# Allegro board modbusRTU.brd
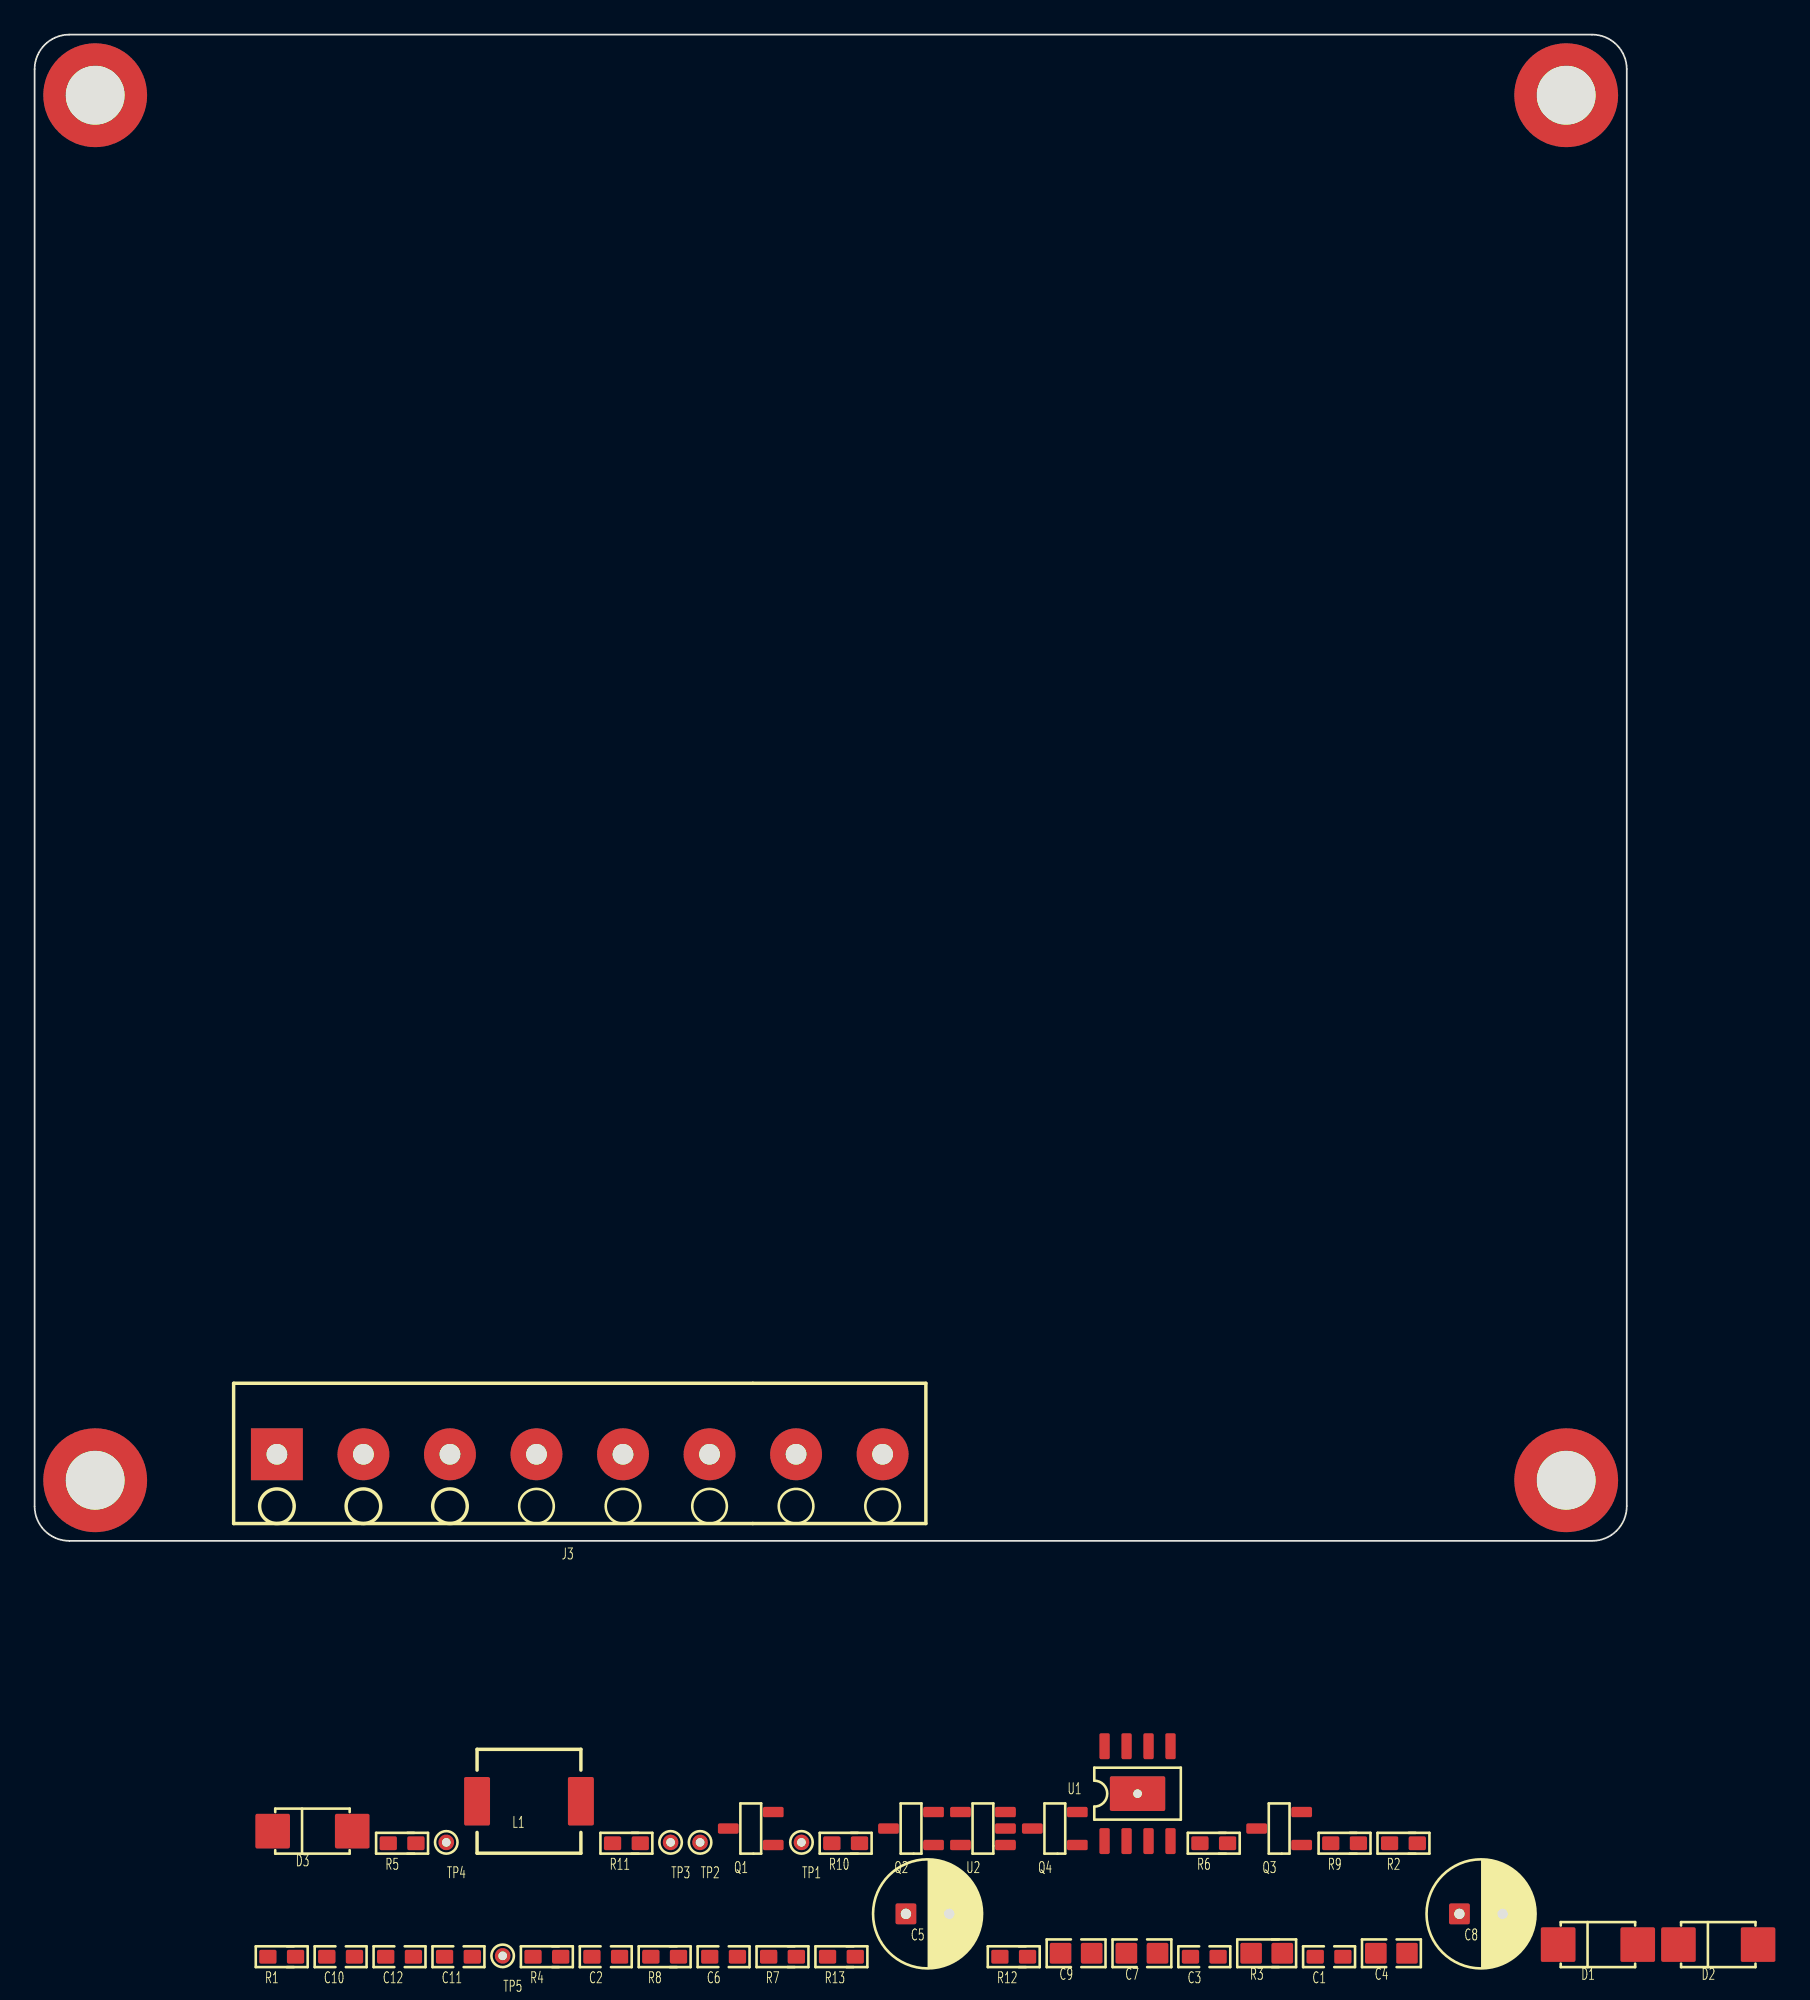
[diagram p0: board, top side]
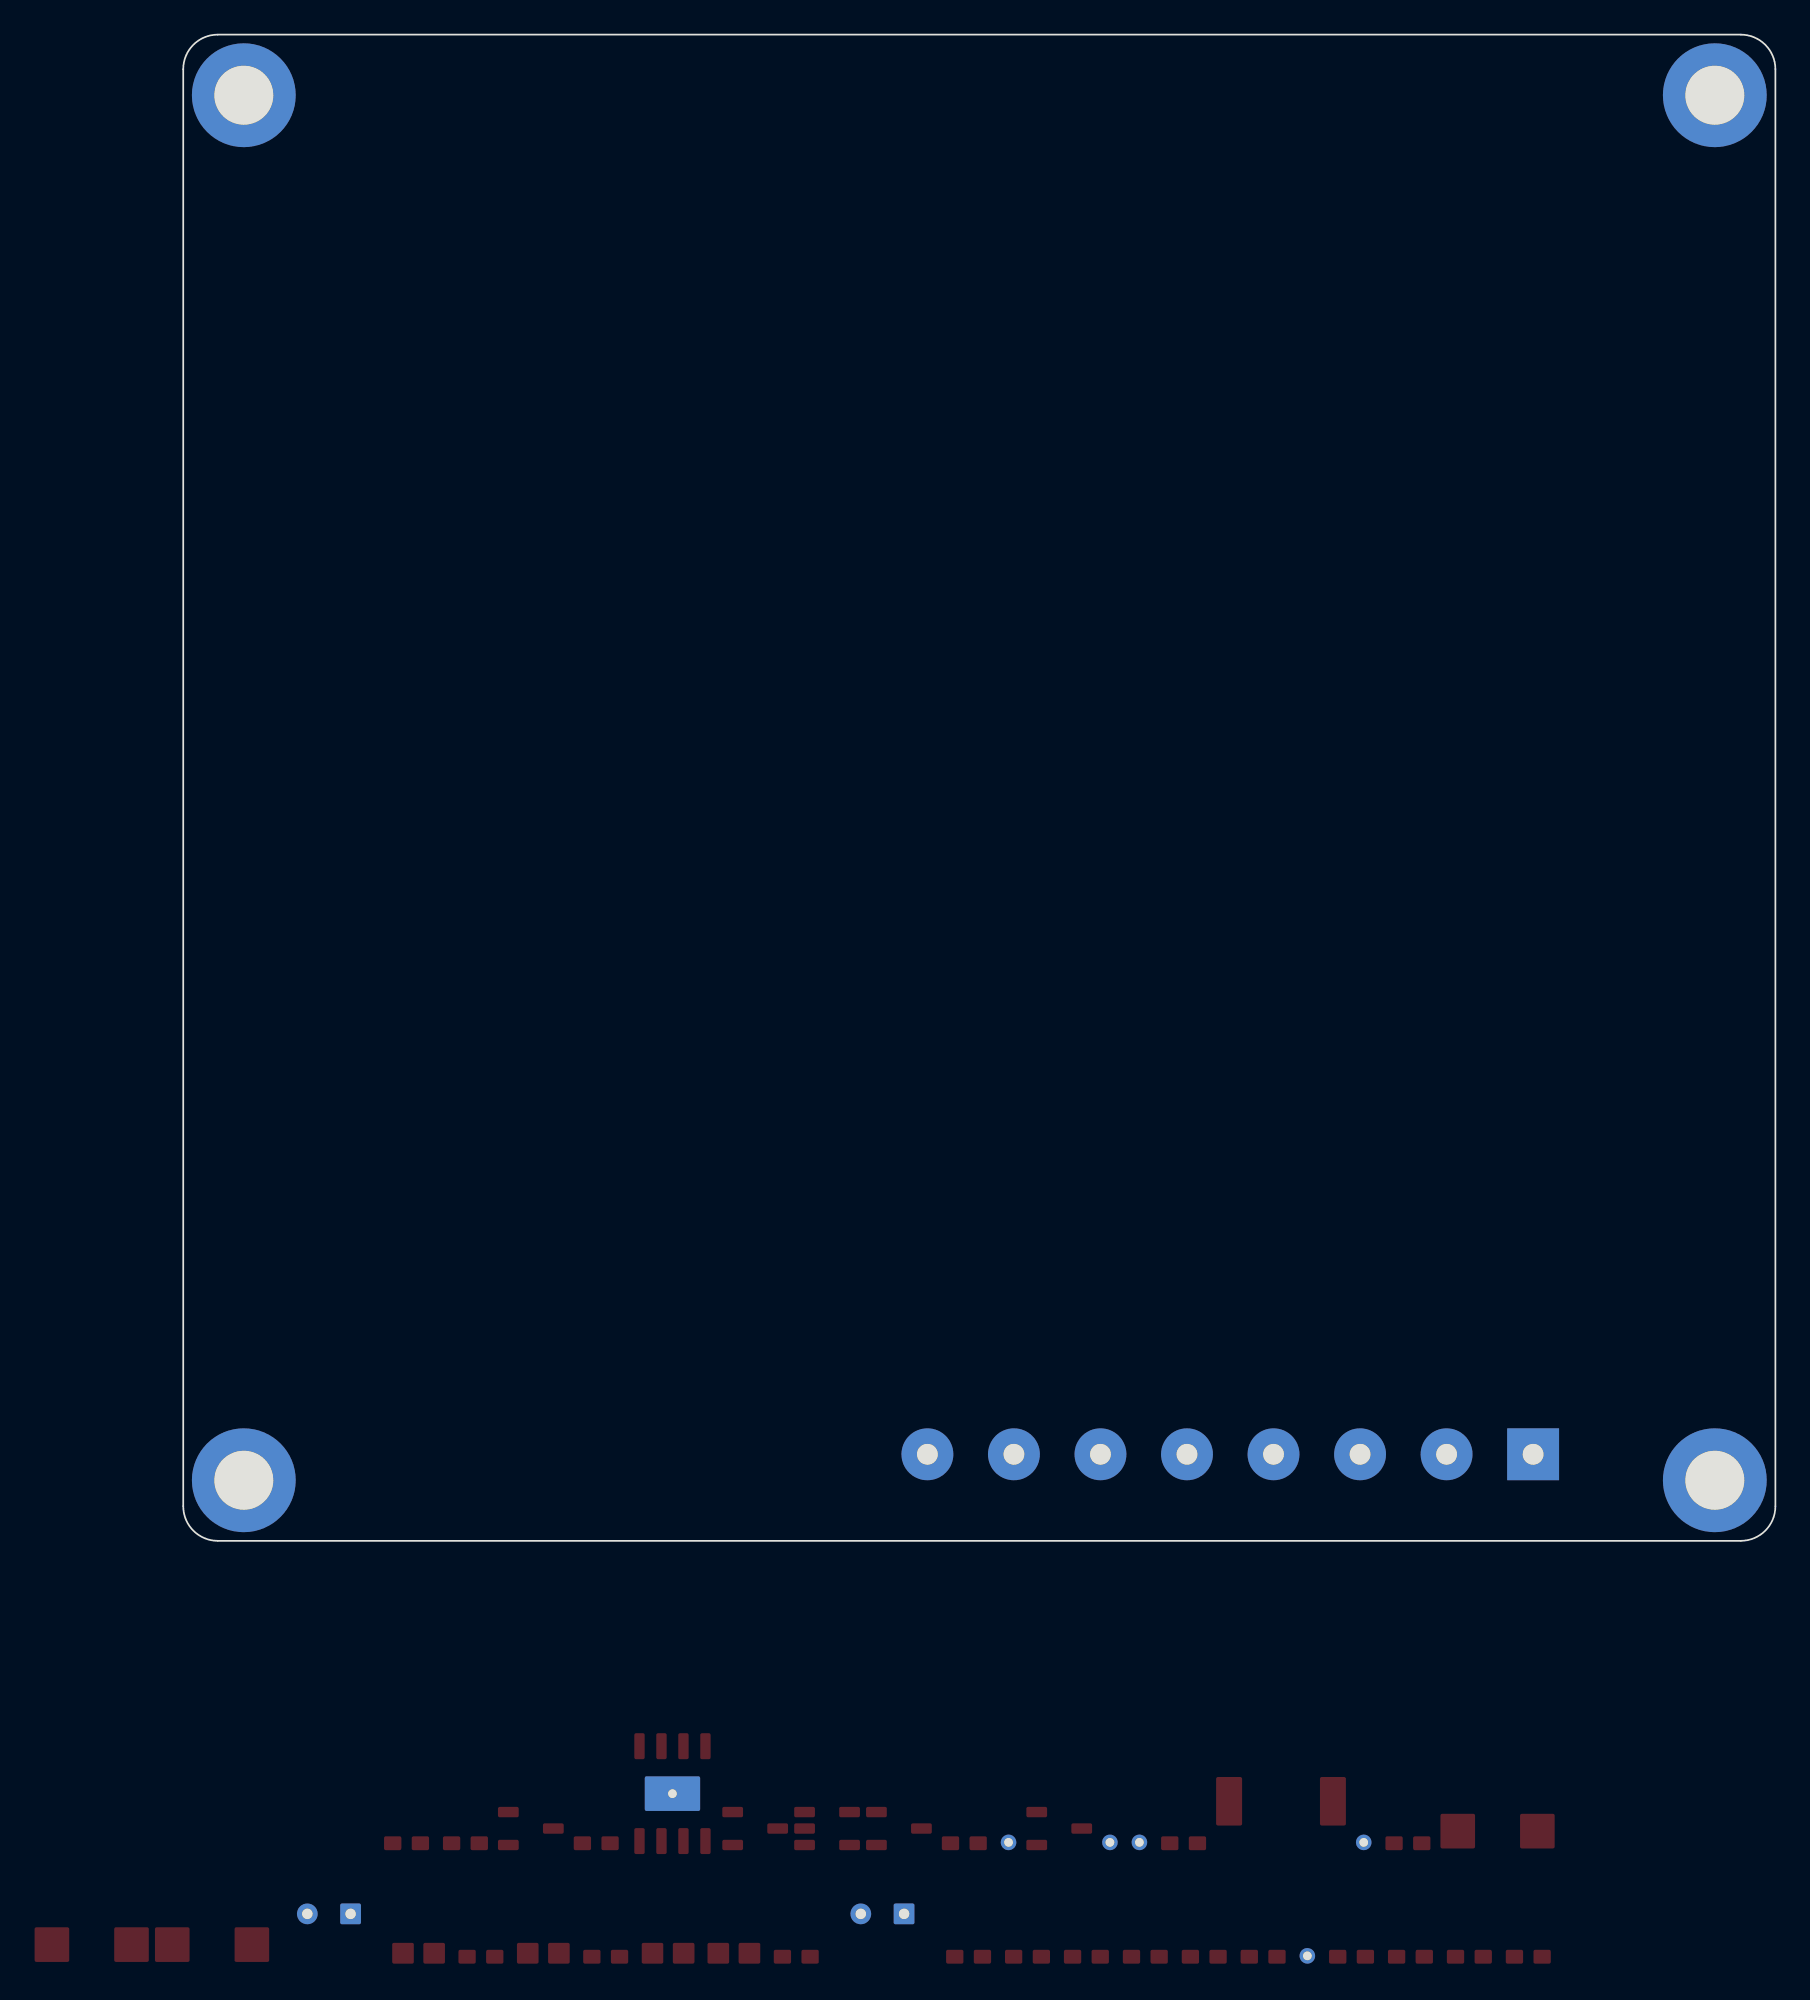
[diagram p1: board, bottom side, seen from below]

Outline 92 x 87 mm; copper layers: TOP, BOTTOM. Coordinates in mm from the lower left corner of the outline.
Outline path: 0,85 0,2 arc(0.59,0.59) 2,0 90,0 arc(91.41,0.59) 92,2 92,85 arc(91.41,86.41) 90,87 2,87 arc(0.59,86.41) 0,85

## Design rules (mm)
constraint set DEFAULT: min track width 0.254

## Placement (name value [footprint] x y rotation side)
C1  0.1uF  [C0603]  74.8 -24.02 0 top
C2  10pF  [C0603]  33 -24.02 0 top
C3  150pF  [C0603]  67.59 -24.02 0 top
C4  10uF/10v  [C0805]  78.4 -23.82 0 top
C5  100uF/16V  [CAPE6X2R50]  51.6 -21.55 0 top
C6  10pF  [C0603]  39.81 -24.02 0 top
C7  2.2uF/50V  [C0805]  63.98 -23.82 0 top
C8  47uF/50V  [CAPE6X2R50]  83.58 -21.55 0 top
C9  2.2uF/50V  [C0805]  60.18 -23.82 0 top
C10  2.2uF/16V  [C0603]  17.68 -24.02 0 top
C11  22nF  [C0603]  24.49 -24.02 0 top
C12  2.2uF/16V  [C0603]  21.09 -24.02 0 top
D1  SS14  [SMA]  90.33 -23.32 0 top
D2  SS14  [SMA]  97.29 -23.32 0 top
D3  SS14  [SMA]  16.05 -16.77 0 top
J3  CONN PCB 8  [CON5MM-8P]  26.5 5 0 top
L1  SLO0630H150MTT  [INDC-SLF6028]  28.57 -15.04 0 top
NOREF  -  [unnamed]  88.5 3.5 90 top
NOREF#2  -  [unnamed]  88.5 83.5 90 top
NOREF#3  -  [unnamed]  3.5 83.5 90 top
NOREF#4  -  [unnamed]  3.5 3.5 90 top
Q1  AO3401A  [SOT23-3]  41.38 -16.62 0 top
Q2  2N7002  [SOT23-3]  50.64 -16.62 0 top
Q3  AO3401  [SOT23-3]  71.91 -16.62 0 top
Q4  2N7002  [SOT23-3]  58.95 -16.62 0 top
R1  100K  [R0603]  14.28 -24.02 0 top
R2  100K  [R0603]  79.1 -17.47 0 top
R3  2R  [R0805]  71.19 -23.82 0 top
R4  100K  [R0603]  29.6 -24.02 0 top
R5  33K  [R0603]  21.23 -17.47 0 top
R6  200K  [R0603]  68.14 -17.47 0 top
R7  10K  [R0603]  43.22 -24.02 0 top
R8  10K  [R0603]  36.41 -24.02 0 top
R9  100K  [R0603]  75.69 -17.47 0 top
R10  100K  [R0603]  46.87 -17.47 0 top
R11  24K  [R0603]  34.2 -17.47 0 top
R12  10K  [R0603]  56.58 -24.02 0 top
R13  10K  [R0603]  46.62 -24.02 0 top
TP1  TP  [TP1]  44.31 -17.42 0 top
TP2  TP  [TP1]  38.45 -17.42 0 top
TP3  TP  [TP1]  36.75 -17.42 0 top
TP4  TP  [TP1]  23.79 -17.42 0 top
TP5  TP  [TP1]  27.05 -23.97 0 top
U1  MP2560  [SOIC-8P]  63.73 -14.6 0 top
U2  RT9193-33GB  [SOT23-5]  54.8 -16.62 0 top

## Library data of the parts
C1-C4 C6 C7 C9 = CAP NP: room: MP2560
C5 C8 = CAP POL
C10-C12 = CAP NP: room: MP2451
D1 D2 = DIODE SCHOTTKY: room: MP2451
D3 = DIODE SCHOTTKY: room: MP2560
J3 = CONN PCB 8
L1 = INDUCTOR
Q1 Q3 = PMOS
Q2 Q4 = NMOS
R1-R3 R5 R8 = RES
R4 R6 R9 R10 = RES: room: MP2560
R7 R12 R13 = RES: room: MP2451
R11 = RESISTOR
TP1-TP5 = TP
U1 = MP2560
U2 = RT9193

## Footprints (pads in the part's own frame, mm; a bottom-side part is the same pattern mirrored in y, then rotated)
C0603
  rrect 1x0.8 smd: 1(-0.8,0) 2(0.8,0)
C0805
  rrect 1.25x1.2 smd: 1(-0.9,0) 2(0.9,0)
CAPE6X2R50
  rrect 1.2x1.2 hole 0.6: 1(-1.25,0)
  round 1.2 hole 0.6: 2(1.25,0)
CON5MM-8P
  rect 3x3 hole 1.2: 1(-12.5,0)
  round 3 hole 1.2: 2(-7.5,0) 3(-2.5,0) 4(2.5,0) 5(7.5,0) 6(12.5,0) 7(17.5,0) 8(22.5,0)
INDC-SLF6028
  rrect 1.5x2.8 smd: 1(-3,0) 2(3,0)
R0603
  rrect 1x0.8 smd: 1(-0.8,0) 2(0.8,0)
R0805
  rrect 1.25x1.2 smd: 1(-0.9,0) 2(0.9,0)
SMA
  rrect 2x2 smd: 1(2.3,0) 2(-2.3,0)
SOIC-8P
  rrect 0.6x1.5 smd: 1(-1.905,-2.74) 2(-0.635,-2.74) 3(0.635,-2.74) 4(1.905,-2.74) 5(1.905,2.74) 6(0.635,2.74) 7(-0.635,2.74) 8(-1.905,2.74)
  rrect 3.2x2 hole 0.5: 9(0,0)
SOT23-3
  rrect 1.2x0.6 smd: 1(1.3,-0.95) 2(1.3,0.95) 3(-1.3,0)
SOT23-5
  rrect 1.2x0.6 smd: 1(1.3,-0.95) 2(1.3,0) 3(1.3,0.95) 4(-1.3,0.95) 5(-1.3,-0.95)
TP1
  round 0.9 hole 0.5: 1(0,0)
unnamed
  round 6 hole 3.4: (0,0)

## Nets
+3V3: C12.1 TP4.1 U2.5(VOUT)
GND: C4.2 C5.2 C6.2 C7.1 C8.2 C9.1 C10.2 C11.2 C12.2 D3.1(CATHODE) J3.4 J3.5 J3.7 Q2.2(SOURCE) Q4.2(SOURCE) R5.2 R6.1 R7.1 R8.2 R9.1 R10.1 R11.1 R13.1 U1.5 U1.9 U2.2
VBAT: Q1.2(SOURCE)
VCC: C2.1 C4.1 C5.1 C10.1 L1.2 Q3.2(SOURCE) R4.2 R12.2 TP3.1 U2.1
VIN: D1.1(CATHODE) J3.6 J3.8 R2.1 TP2.1
ADC_VBAT: R1.2 R5.1
ADC_VIN: R2.2 R8.1
BAT_PWR: Q2.1 R7.2
GSM_PWR: Q4.1 R13.2
RS485A: J3.1
RS485B: J3.2
USER_KEY: J3.3
VGSM: Q3.3 TP5.1
N425748: C8.1 C9.2 D1.2 D2.2 R3.1 U1.7(VIN)
N425772: C1.1 D3.2 L1.1 U1.1
N425872: C1.2 U1.8
N425896: R6.2 U1.6
N425904: C2.2 R4.1 R10.2 R11.2 U1.4
N425936: C3.1 C6.1 U1.3
N425988: C7.2 R3.2
N426114: C3.2 R9.2
N675915: C11.1 U2.4
N702312: R12.1 U2.3
N767247: D2.1(CATHODE) Q1.3 R1.1 TP1.1
N768827: Q1.1 Q2.3
N770522: Q3.1 Q4.3

Pads without a net: U1 2
